# EAGLE board FMBTECH (EAGLE 8.4.0)
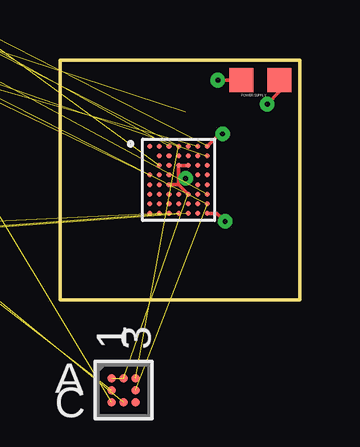
[diagram p0: board, top side]
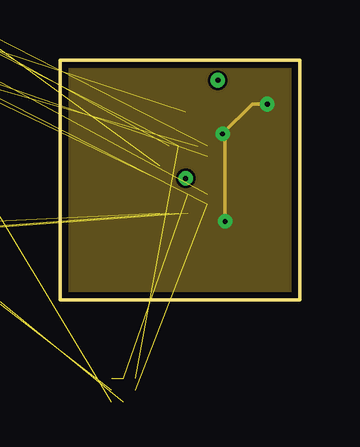
[diagram p1: board, inner layer Route8]
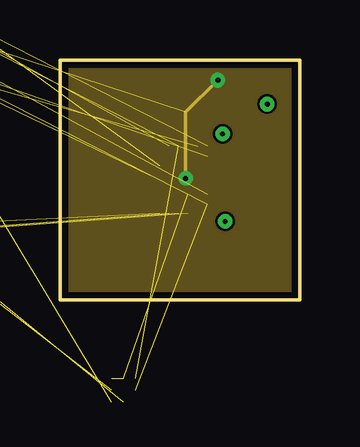
[diagram p2: board, inner layer Route10]
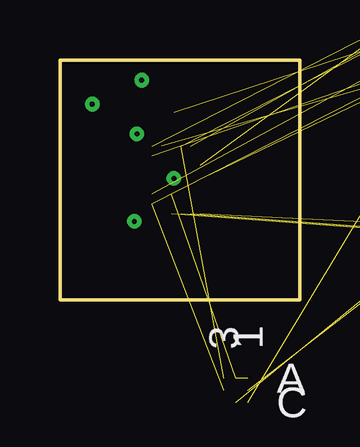
[diagram p3: board, bottom side, seen from below]

Size 10 x 10 mm. Coordinates in mm from the lower left corner, seen from the top.
Outline: 0,0 10,0 10,10 0,10 0,0
Copper layers ((1*4)*((8*10)*(12*16))): Top 0.035mm / dielectric 1.5mm / Route4 0.035mm / dielectric 0.15mm / Route8 0.035mm / dielectric 0.15mm / Route10 0.035mm / dielectric 0.15mm / Route12 0.035mm / dielectric 0.15mm / Bottom 0.035mm
Design rules "default *": minimum track width 4mil, minimum drill 8mil, track to track 4mil, track to pad 4mil, pad to pad 4mil, via to via 4mil, smd to smd 2mil, copper to edge 10mil, drill to drill 10mil, minimum pad ring 10mil, minimum via ring 8mil, stop-mask expansion 4mil, vias tented up to drill 0mil, thermal gap 10mil

## Footprints (pad centres in the part's own frame; a part is rotated, then mirrored left to right if it is on the bottom)
1 = smd 0.62 x 1.36: 1 0,0; 2 2.58,0
0201 = smd 0.559 x 0.305: 1 -0.394,0; 2 0.394,0
G-033 = smd 0.406 x 0.305: 1 -0.305,0; 2 0.305,0
BGA50N40P7X8_300X320X40 = smd 0.2 x 0.2: A1 -1.2,1.4; A2 -0.8,1.4; A3 -0.4,1.4; A4 0,1.4; A5 0.4,1.4; A6 0.8,1.4; A7 1.2,1.4; B2 -0.8,1; B3 -0.4,1; B4 0,1; B5 0.4,1; B6 0.8,1; B7 1.2,1; C2 -0.8,0.6; C3 -0.4,0.6; C4 0,0.6; C5 0.4,0.6; C6 0.8,0.6; C7 1.2,0.6; D1 -1.2,0.2; D2 -0.8,0.2; D3 -0.4,0.2; D6 0.8,0.2; D7 1.2,0.2; E1 -1.2,-0.2; E2 -0.8,-0.2; E3 -0.4,-0.2; E6 0.8,-0.2; E7 1.2,-0.2; F1 -1.2,-0.6; F2 -0.8,-0.6; F3 -0.4,-0.6; F4 0,-0.6; F5 0.4,-0.6; F6 0.8,-0.6; F7 1.2,-0.6; G1 -1.2,-1; G2 -0.8,-1; G3 -0.4,-1; G4 0,-1; G5 0.4,-1; G6 0.8,-1; G7 1.2,-1; H1 -1.2,-1.4; H2 -0.8,-1.4; H3 -0.4,-1.4; H4 0,-1.4; H5 0.4,-1.4; H6 0.8,-1.4; H7 1.2,-1.4
RC0402N = smd 0.66 x 0.508: 1 -0.559,0; 2 0.559,0
RES = smd 0.457 x 0.508: 1 -0.457,0; 2 0.457,0
YZF8 = smd 0.35 x 0.35: A1 -0.5,0.5; A2 0,0.5; A3 0.5,0.5; B1 -0.5,0; B3 0.5,0; C1 -0.5,-0.5; C2 0,-0.5; C3 0.5,-0.5
TFLGA-16/3.3MMX3.1MM = smd 0.925 x 0.3: 1 -1.288,1; 2 -1.288,0.5; 3 -1.288,0; 4 -1.288,-0.5; 5 -1.288,-1; 9 1.288,-1; 10 1.288,-0.5; 11 1.288,0; 12 1.288,0.5; 13 1.288,1 | smd 0.3 x 0.8: 6 -0.5,-1.275; 7 0,-1.275; 8 0.5,-1.275; 14 0.5,1.275; 15 0,1.275; 16 -0.5,1.275
CAP = smd 0.34 x 0.36: 1 -0.28,0; 2 0.28,0
CAP' = smd 0.58 x 0.62: 1 -0.47,0; 2 0.47,0
1' = smd 0.23 x 0.3: 1 -0.235,0; 2 0.235,0
SUPPLY = smd 1 x 1: P$1 0,0; P$2 1.6,0

## Placement (x,y rotation side)
ANT1  ANTENNASMD  [1]  -22.86,10.16 0 top  (outside the outline)
C1  02016D104KAT2A  [0201]  -16.51,13.97 0 top  (outside the outline)
C2  02016D104KAT2A  [0201]  -20.32,13.97 0 top  (outside the outline)
C3  GRM0335C1E101JA01D  [G-033]  -13.97,19.05 0 top  (outside the outline)
C4  02016D104KAT2A  [0201]  -24.13,13.97 0 top  (outside the outline)
C5  02016D104KAT2A  [0201]  -27.94,13.97 0 top  (outside the outline)
C6  02016D104KAT2A  [0201]  -13.97,16.51 0 top  (outside the outline)
C7  02016D104KAT2A  [0201]  -17.78,16.51 0 top  (outside the outline)
C8  02016D104KAT2A  [0201]  -21.59,16.51 0 top  (outside the outline)
C9  02016D104KAT2A  [0201]  -25.4,16.51 0 top  (outside the outline)
NRF  NRF52832-CIAA-R  [BGA50N40P7X8_300X320X40]  4.95,5 0 top
R1  RC0402JR-0710KL  [RC0402N]  -20.32,19.05 0 top  (outside the outline)
R2  RC0402JR-0710KL  [RC0402N]  -22.86,19.05 0 top  (outside the outline)
R3  RC0402JR-0710KL  [RC0402N]  -25.4,19.05 0 top  (outside the outline)
R4  RC0402JR-0710KL  [RC0402N]  -27.94,19.05 0 top  (outside the outline)
R5  RC0402JR-0710KL  [RC0402N]  -13.97,21.59 0 top  (outside the outline)
R6  100OHMRC0402N-L  [RES]  -17.78,19.05 0 top  (outside the outline)
U2  TMP006BIYZFT  [YZF8]  2.66,-3.78 0 top  (outside the outline)
U3  ADXL362  [TFLGA-16/3.3MMX3.1MM]  -26.67,2.54 0 top  (outside the outline)
U$1  4.7µF  [CAP]  -16.51,21.59 0 top  (outside the outline)
U$2  0.8PF  [CAP']  -13.97,13.97 0 top  (outside the outline)
U$3  INDUCTOR  [1']  -19.05,21.59 0 top  (outside the outline)
U$4  SUPPLY  [SUPPLY]  7.56,9.16 0 top

## Library data of the parts
ANT1 = antenna; AVAILABILITY: Good; DESCRIPTION: Bluetooth/WLAN/WiFi Ceramic Chip Antenna 3-Pin SMD; MF: Pulse; MP: W3008; PACKAGE: None; PRICE: 0.93 USD
C1 C2 C4-C9 = cap_1microfarad; MANUFACTURER_PART_NUMBER: 02016D104KAT2A; VENDOR: AVX Corporation
C3 = cap_100picofarad; MANUFACTURER_PART_NUMBER: GRM0335C1E101JA01D; VENDOR: Murata
NRF = NRF52832-CIAA-R; AVAILABILITY: Good; DESCRIPTION: Multi Protocal Bluetooth Smart ANT 2.4GHz RF SoC (WL-CSP); MF: Nordic Semiconductor; MP: NRF52832-CIAA-R; PACKAGE: XFBGA-50 Nordic Semiconductor; PRICE: 3.94 USD
R1-R5 = res_10kohm; MANUFACTURER_PART_NUMBER: RC0402JR0710KL; VENDOR: Yageo
R6 = 100ohm; MANUFACTURER_PART_NUMBER: RC0402FR07100RL; VENDOR: Yageo
U2 = tmp006b; MANUFACTURER_PART_NUMBER: TMP006BIYZFT; VENDOR: Texas Instruments
U3 = ADXL362; AVAILABILITY: Good; DESCRIPTION: Accelerometer Triple ±2/±4/±8g 1.6V to 3.6V 16-Pin LGA T/R; MF: Analog Devices; MP: ADXL362BCCZ-RL7; PACKAGE: LGA-16 Analog Devices; PRICE: 6.52 USD
U$1 = 4p7microfarad
U$2 = 0p8picofarad
U$3 = inductor
U$4 = supply

## Nets
ADXL_POWER: C9.1 NRF.A3 R6.1 U3.1
ANT: NRF.D1 U$2.1 U$3.1
CS: NRF.H5 U3.8
DCC: NRF.B6
DEC2: NRF.A2
GND: ANT1.2 C1.2 C2.2 C3.2 C4.1 C5.1 C6.1 C7.1 C8.2 C9.2 NRF.C4 NRF.C5 NRF.E3 NRF.F5 R4.1 R5.1 U2.A1 U2.A2 U3.12 U3.13 U3.16 U$1.1 U$2.2 U$4.P$1
MISO: NRF.H4 U3.7
MOSI: NRF.H3 U3.6
N$1: R5.2 U2.C1
N$2: U2.C3
N$3: R4.2 U2.B1
N$4: R3.1 U2.C2
N$5: ANT1.1 U$3.2
N$6: C2.1 NRF.A6
N$8: C1.1 NRF.B7
N$9: C3.1 NRF.C2
N$10: C8.1 R6.2 U3.14
RESET: NRF.H1
SCL: NRF.G7 R2.1 U2.B3
SCLK: NRF.H2 U3.4
SDA: NRF.F7 R1.1
STATUSLED: NRF.H6
SWDCLK: NRF.F1
SWDIO: NRF.G1
TMP_POWER: C4.2 C5.2 NRF.A4 R1.2 R2.2 R3.2 U2.A3
VCC: C6.2 C7.2 NRF.A7 NRF.H7 U$1.2 U$4.P$2
VSS_PA: NRF.D2

## Tracks (layer width: path | path; a pad name or v marks a point on that pad's centre or on a via)
ADXL_POWER  (3 unrouted)
ANT  (2 unrouted)
CS  (1 unrouted)
GND  (via drill 0.2)  (19 unrouted)
  Top 0.152: NRF.C5 NRF.C4 4.95,5.07 | NRF.F5 4.95,4.8 4.88,4.8 | 4.88,4.8 NRF.E3 | 4.88,4.8 4.95,4.88 4.95,5.07 | U$4.P$1 v6.59,9.16 v6.59,9.15 | 4.95,5.07 4.96,5.06 v5.25,5.06
  Route10 0.152: v5.25,5.06 5.25,7.81 v6.59,9.15
  pour Route10 (no thermals): 0,0 10,0 10,10 0,10
MISO  (1 unrouted)
MOSI  (1 unrouted)
N$1  (1 unrouted)
N$3  (1 unrouted)
N$4  (1 unrouted)
N$5  (1 unrouted)
N$6  (1 unrouted)
N$8  (1 unrouted)
N$9  (1 unrouted)
N$10  (2 unrouted)
SCL  (2 unrouted)
SCLK  (1 unrouted)
SDA  (1 unrouted)
TMP_POWER  (6 unrouted)
VCC  (via drill 0.2)  (3 unrouted)
  Top 0.152: NRF.A7 6.67,6.92 v6.79,6.92 | v8.65,8.16 9.16,8.67 U$4.P$2 | NRF.H7 6.56,3.6 v6.89,3.27
  Route8 0.152: v8.65,8.16 8.03,8.16 v6.79,6.92 6.89,6.81 v6.89,3.27
  pour Route8 (no thermals): 0,0 10,0 10,10 0,10